# Altium PCB test-board-molex-bias-tee.PcbDoc (part 1 of 2)
Units mil, origin at the board's own origin, x right, y up, seen from the top; angles counter-clockwise.
Board outline 5500 x 3250 mil, 4 copper layers (Top Layer, Mid-Layer 1, Mid-Layer 2, Bottom Layer), stack 43.512 mil thick; 35 components, 16 nets, 287 pads, 1498 vias.
Unrouted connection lines stored in the file: 13.
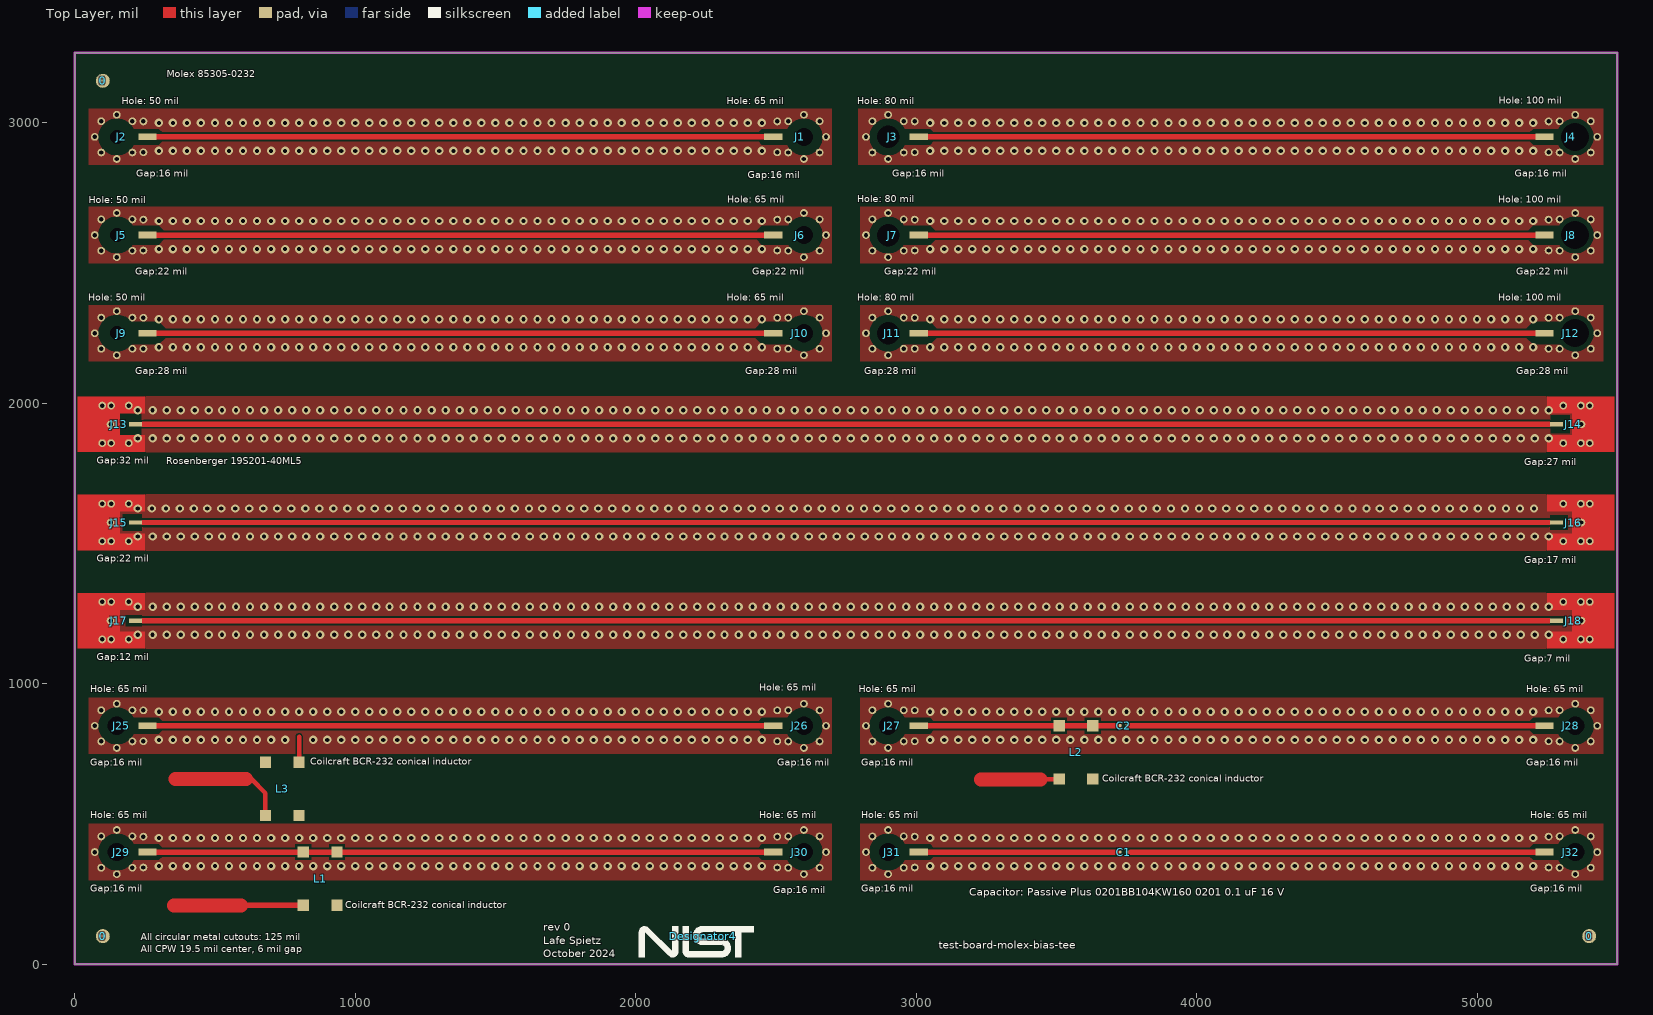
[diagram p0: Top Layer view]
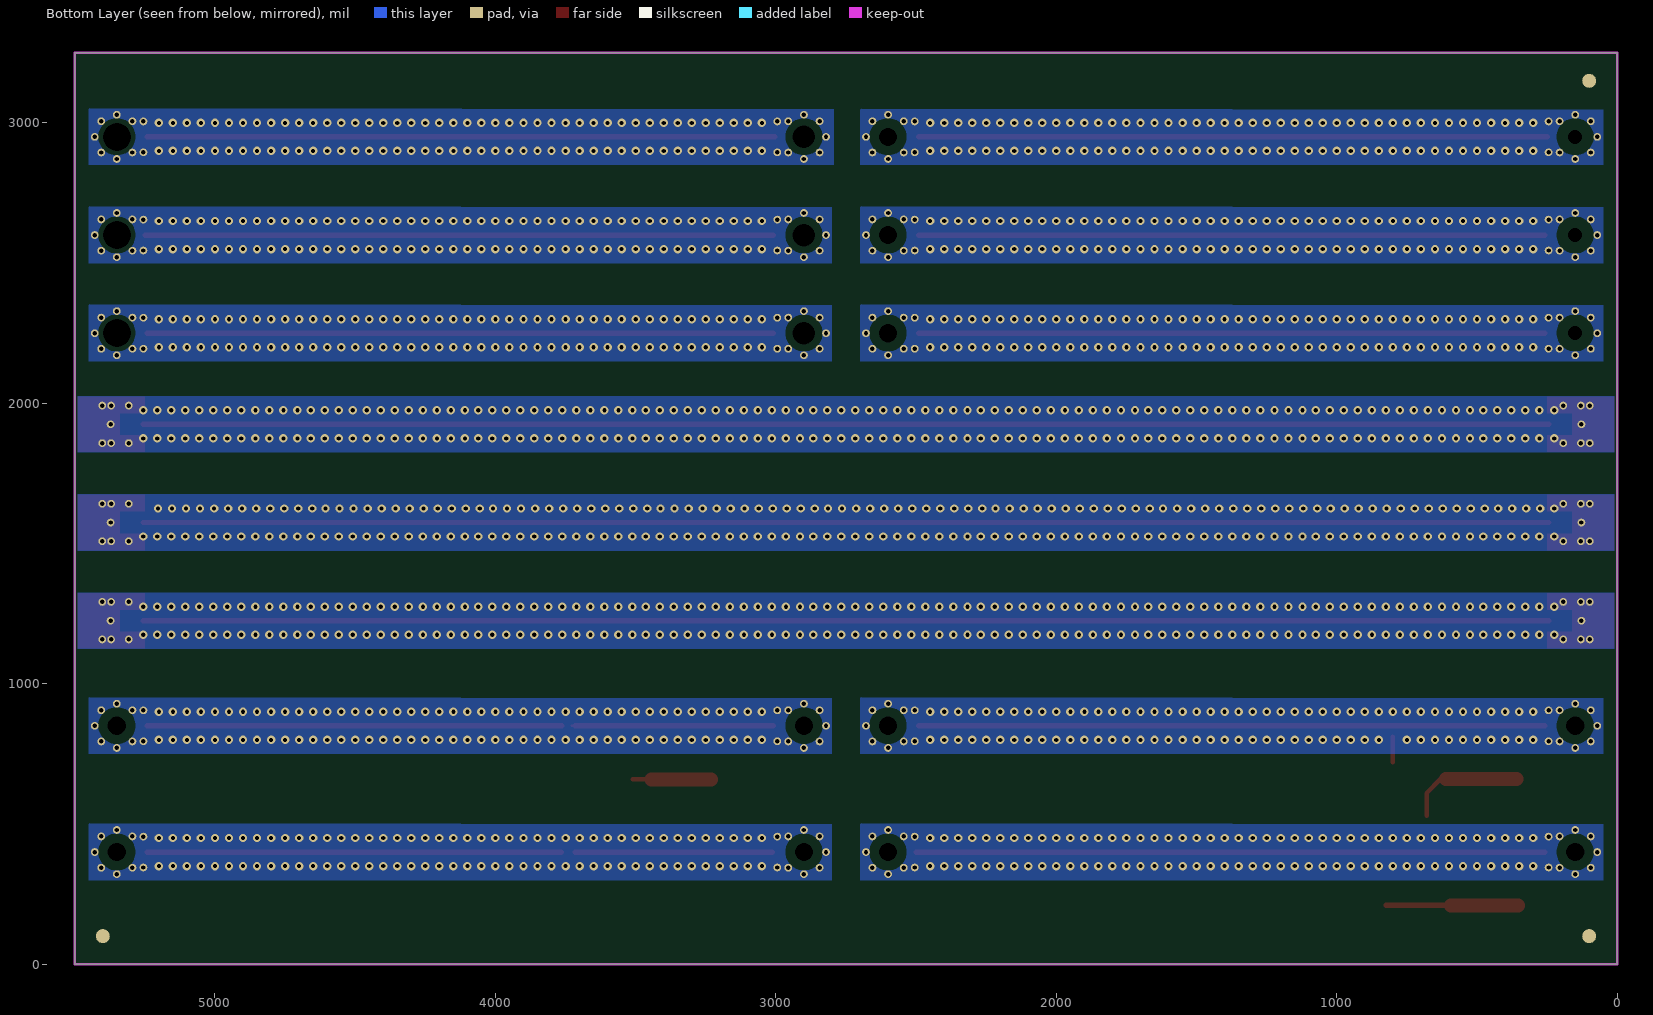
[diagram p1: Bottom Layer view, seen from below]
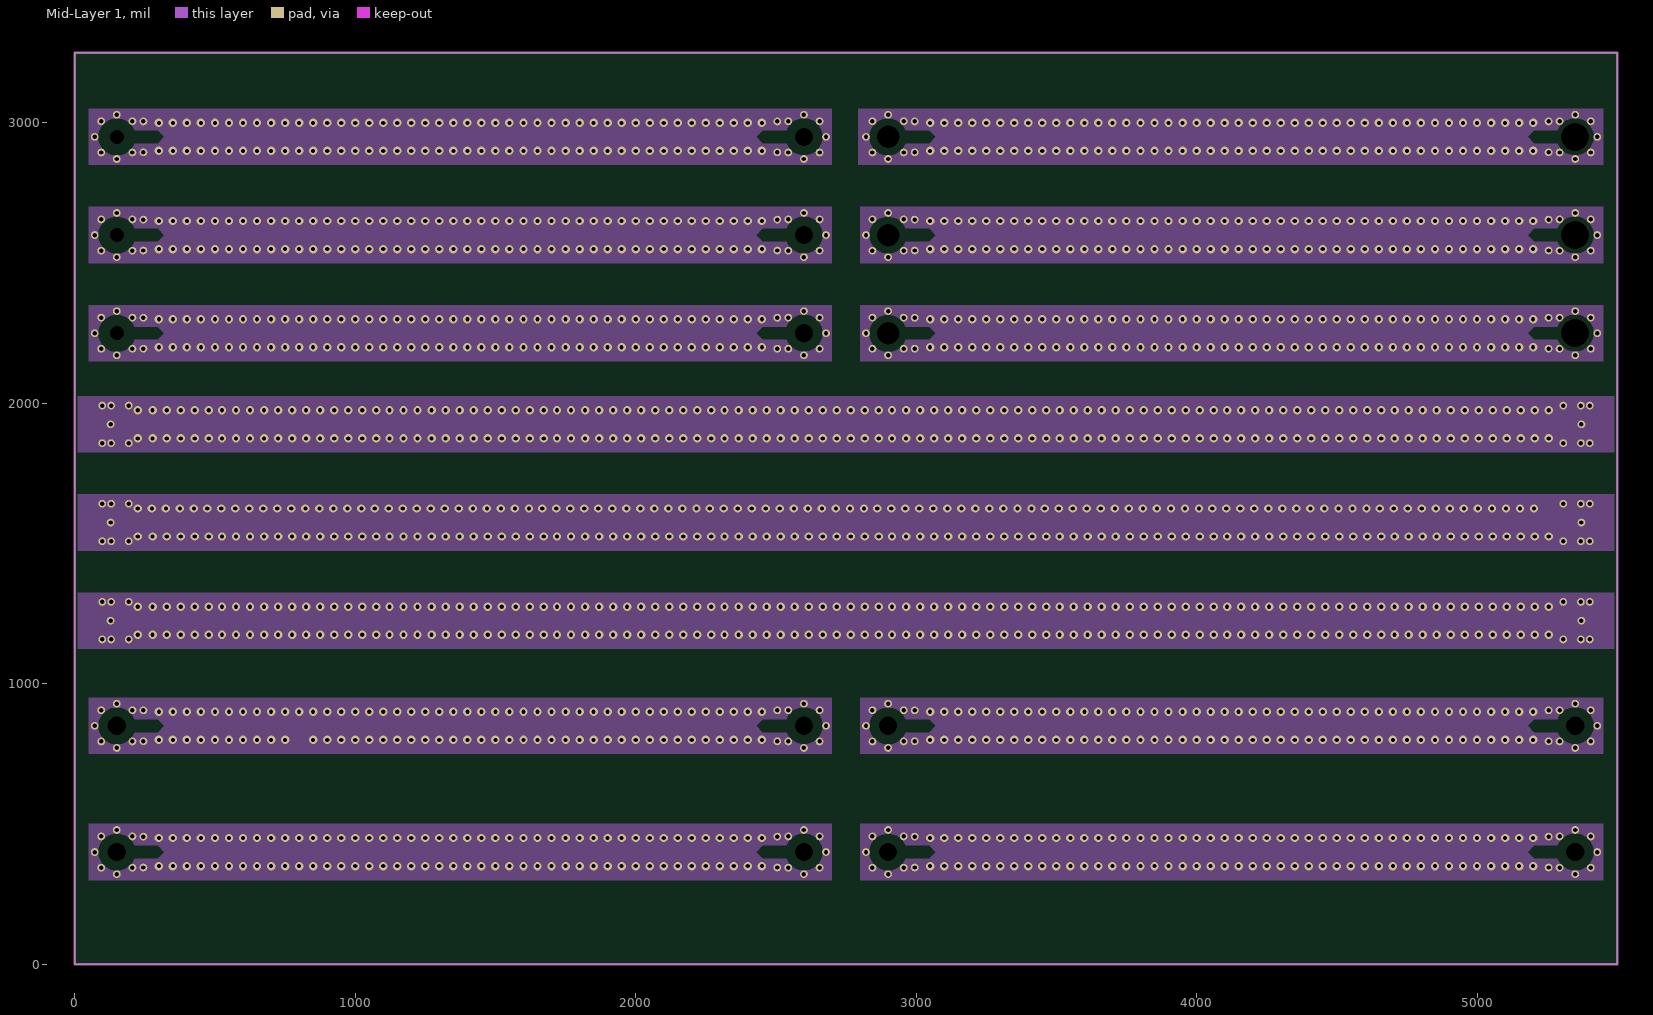
[diagram p2: Mid-Layer 1]
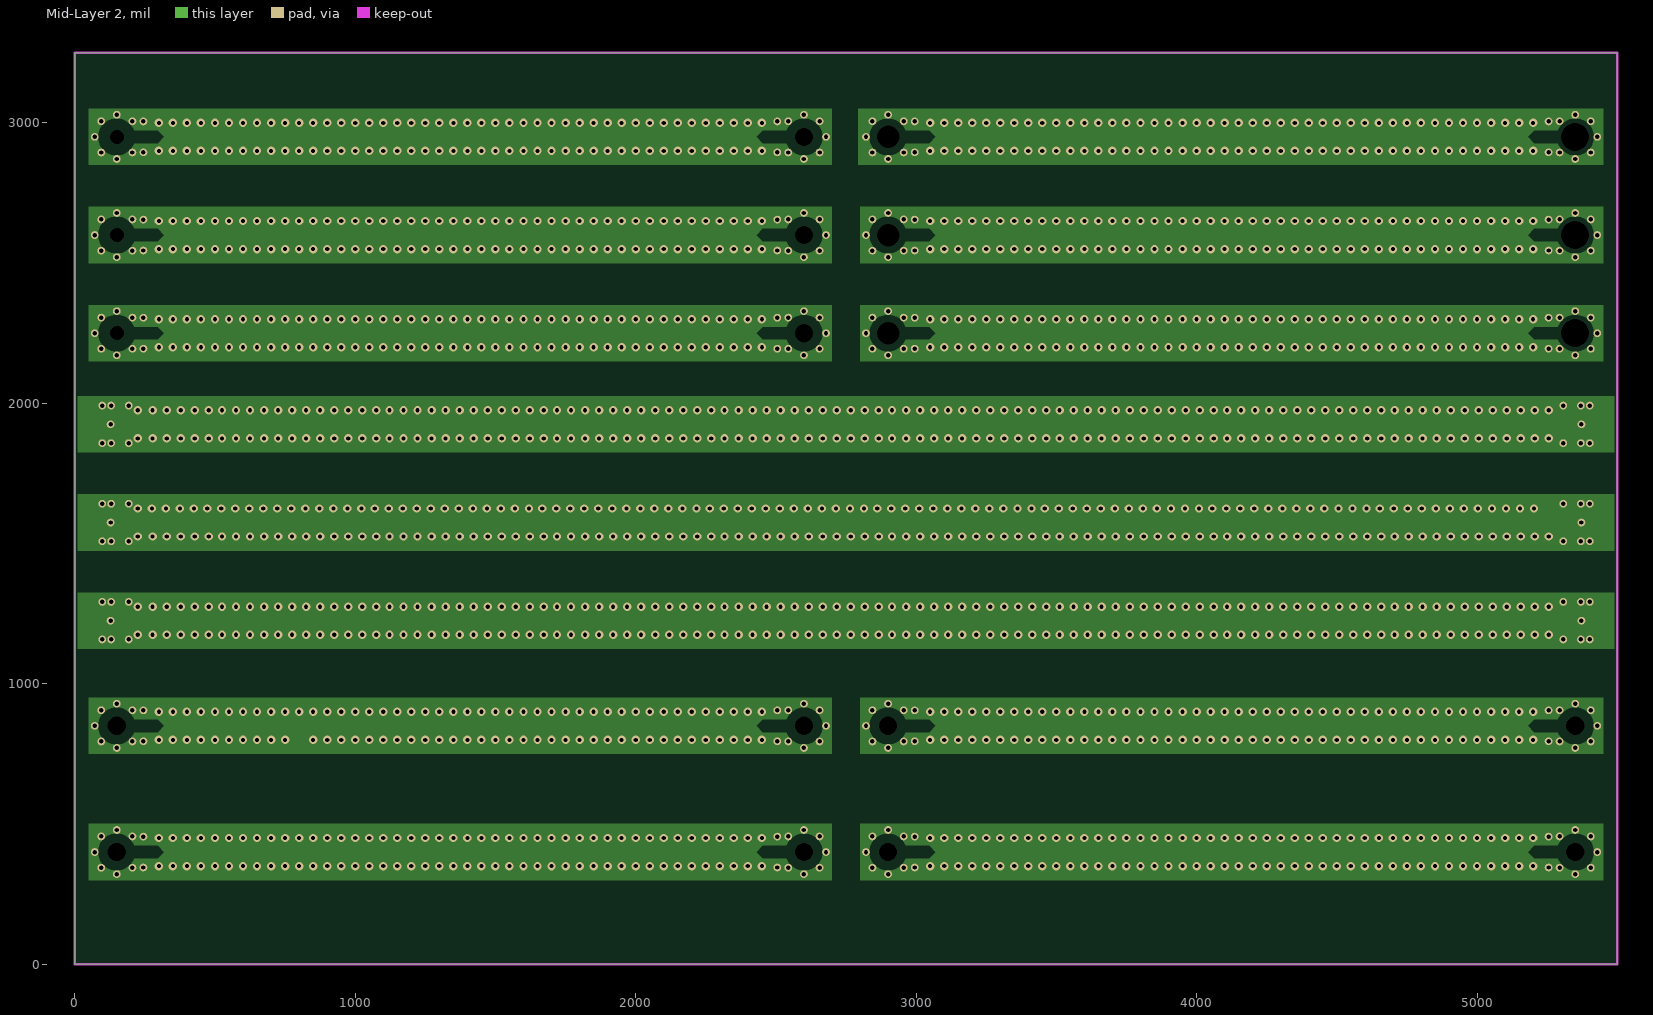
[diagram p3: Mid-Layer 2]
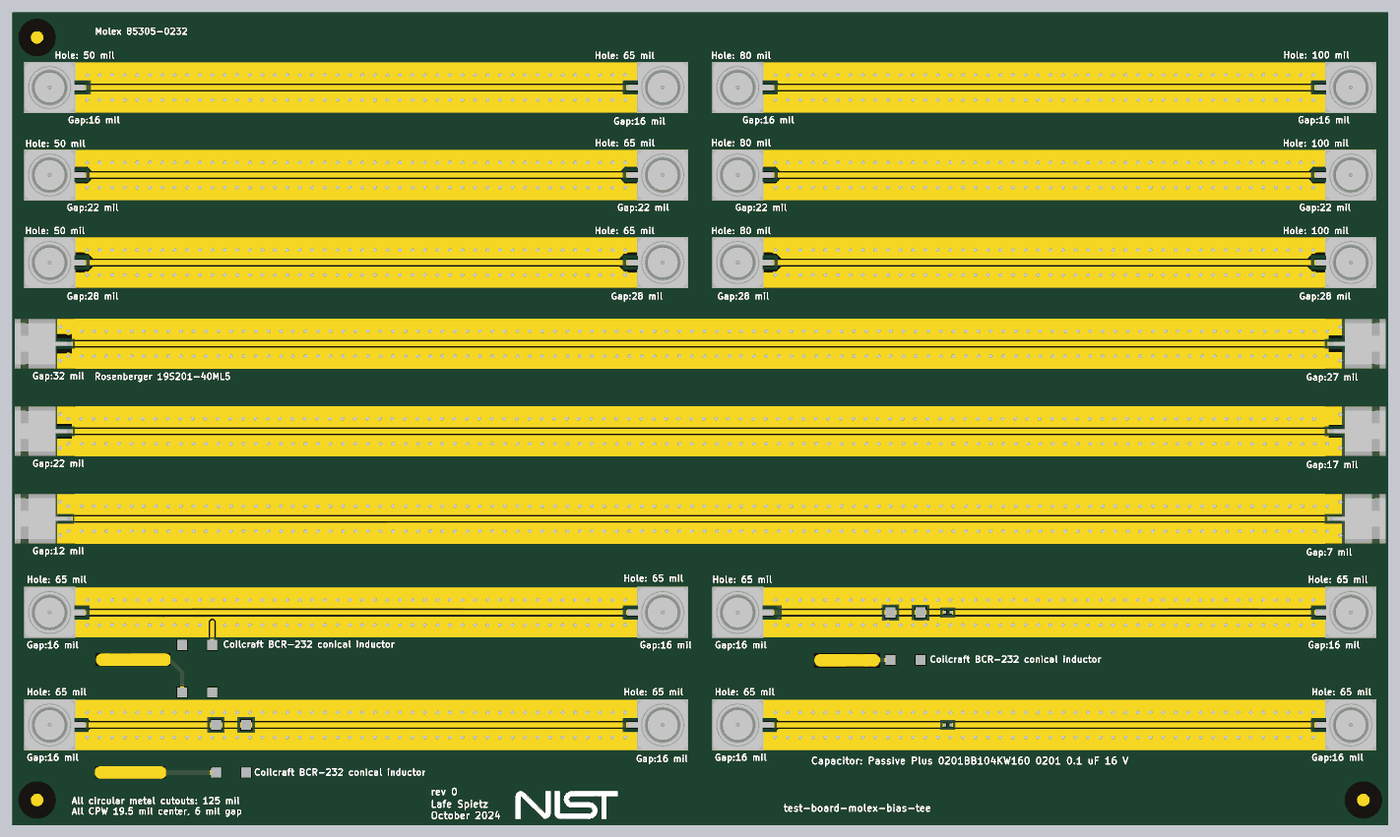
[diagram p5: 3D render of the assembled board from above, using the file's embedded part models]

## Layer stack, top to bottom
Top Solder: solder mask 1, SM-001, Dk 4
Top Layer: signal copper 1.378
Core1: dielectric 10, RO4350B, Dk 3.48
Mid-Layer 1: signal copper 1.378
Dielectric 1: prepreg 7, PR7628, Dk 4.24
Dielectric 2: prepreg 4, PR2116, Dk 4.17
Dielectric 3: prepreg 7, PR7628, Dk 4.24
Mid-Layer 2: signal copper 1.378
Core2: dielectric 10, RO-4350B, Dk 3.48
Bottom Layer: signal copper 1.378
Bottom Solder: solder mask 1, SM-001, Dk 4

## Board outline
0,0 5500,0 5500,3250 0,3250

## Design rules (kind name [scope] priority, off if disabled: settings)
Clearance [All] p1: gap=10 ignorepadtopadclearanceinfootprint=FALSE except(0: Poly-Poly Poly-Region Poly-Hole; 3.74: Track-Region SMDPad-Region Region-Region; 3.94: Track-Track Via-Poly; 4: Track-Fill; 6: Arc-Poly Track-Poly; 8: Arc-SMDPad Track-SMDPad SMDPad-Poly; 9: SMDPad-SMDPad)
PolygonConnect [All] p1: connectstyle=Direct reliefconductorwidth=10 reliefentries=4 polygonreliefangle="90 Angle" airgapwidth=10
RoutingVias [All] p1: holewidth=15 width=25 viastyle="Through Hole" minholewidth=5 minwidth=10 maxholewidth=28 maxwidth=50
SolderMaskExpansion [All] p1: expansion=4 istentingtop=FALSE
Width [All] p1 off: maxlimit=21.65 minlimit=3.94 preferedwidth=10 toplayer_prefwidth=3.94 midlayer1_minwidth=10 midlayer1_maxwidth=10 midlayer2_minwidth=10 midlayer2_maxwidth=10 bottomlayer_minwidth=10 bottomlayer_maxwidth=10 minimp=50.000000 maximp=50.000000 favimp=50.000000
Width cpw-Z-1 [All] p2 off: maxlimit=19.68 minlimit=6.87 preferedwidth=10 toplayer_minwidth=12.7 toplayer_prefwidth=15.98 impedanceprofiledriven=TRUE impedanceprofileid={FF6547F1-1ACB-4B88-A69B-03F59FE56022} minimp=50.000000 maximp=50.000000 favimp=50.000000
30 further rules are at their usual default settings.

## Classes and differential pairs
component class test-board-molex-bias-tee: C1 C2 J1 J2 J3 J4 J5 J6 J7 J8 J9 J10 J11 J12 J13 J14 J15 J16 J17 J18 J25 J26 J27 J28 J29 J30 J31 J32 L1 L2 L3

## Components (designator, comment, footprint, x,y, rotation, side; value= is the part's Value field where it differs from the comment)
0 "Fiducial" fiducial 100,100 r90 top
0 "Fiducial" fiducial 100,3150 r90 top
0 "Fiducial" fiducial 5400,100 r90 top
C1 "100 nF" 0201-capacitor 3740,400 r0 top
C2 "100 nF" 0201-capacitor 3740,850 r0 top
Designator4 "Comment" "NIST logo - TopOverlay" 2239.05,100.18 r0 top
J1 "85305-0232" MOLEX_85305-0232 2600,2950 r270 top
J2 "85305-0232" MOLEX_85305-0232 150,2950 r90 top
J3 "85305-0232" MOLEX_85305-0232 2900,2950 r90 top
J4 "85305-0232" MOLEX_85305-0232 5350,2950 r270 top
J5 "85305-0232" MOLEX_85305-0232 150,2600 r90 top
J6 "85305-0232" MOLEX_85305-0232 2600,2600 r270 top
J7 "85305-0232" MOLEX_85305-0232 2900,2600 r90 top
J8 "85305-0232" MOLEX_85305-0232 5350,2600 r270 top
J9 "85305-0232" MOLEX_85305-0232 150,2250 r90 top
J10 "85305-0232" MOLEX_85305-0232 2600,2250 r270 top
J11 "85305-0232" MOLEX_85305-0232 2900,2250 r90 top
J12 "85305-0232" MOLEX_85305-0232 5350,2250 r270 top
J13 "SMP-right-angle-19S201-40ML5" rosenberger-19S201-40ML5 110,1925 r90 top
J14 "SMP-right-angle-19S201-40ML5" rosenberger-19S201-40ML5 5390,1925 r270 top
J15 "SMP-right-angle-19S201-40ML5" rosenberger-19S201-40ML5 110,1575 r90 top
J16 "SMP-right-angle-19S201-40ML5" rosenberger-19S201-40ML5 5390,1575 r270 top
J17 "SMP-right-angle-19S201-40ML5" rosenberger-19S201-40ML5 110,1225 r90 top
J18 "SMP-right-angle-19S201-40ML5" rosenberger-19S201-40ML5 5390,1225 r270 top
J25 "85305-0232" MOLEX_85305-0232 150,850 r90 top
J26 "85305-0232" MOLEX_85305-0232 2600,850 r270 top
J27 "85305-0232" MOLEX_85305-0232 2900,850 r90 top
J28 "85305-0232" MOLEX_85305-0232 5350,850 r270 top
J29 "85305-0232" MOLEX_85305-0232 150,400 r90 top
J30 "85305-0232" MOLEX_85305-0232 2600,400 r270 top
J31 "85305-0232" MOLEX_85305-0232 2900,400 r90 top
J32 "85305-0232" MOLEX_85305-0232 5350,400 r270 top
L1 "Coilcraft BCR-232 conical inductor" "Coilcraft BCR-232 conical inductor" 875,305 r90 top
L2 "Coilcraft BCR-232 conical inductor" "Coilcraft BCR-232 conical inductor" 3570,755 r90 top
L3 "Coilcraft BCR-232 conical inductor" "Coilcraft BCR-232 conical inductor" 740,625 r90 top

## Footprints (in the part's own frame and the unit in brackets; to place one, negate y for a bottom-side part, rotate by r counter-clockwise, add the part's x,y. Pads: shape width x height; smd on the part's side, far side on the other; paste and mask are expansions set on the pad)
0201-capacitor [mm]
  rect 0.25x0.3 smd: 1(-0.3,0) 2(0.3,0)
"Coilcraft BCR-232 conical inductor" [mil] "Coilcraft BCR-232 conical inductor"
  rect 40x40 smd: 1(95,-60) 2(-95,60) *(-95,-60) *(95,60)
fiducial [mil]
  round 50 / inner round 0 / far side round 50 all layers, no hole paste-99999 mask+50: 1(0,0)
MOLEX_85305-0232 [mm]
  rect 0.61x1.651 smd: 1(0,-2.775)
  round 0.7 hole 0.4 mask+0: gnd(-2,0) gnd(-1.414,1.414) gnd(-1.414,-1.414) gnd(-1.4,-2.41) gnd(0,2) gnd(1.4,-2.41) gnd(1.414,1.414) gnd(1.414,-1.414) gnd(2,0)
  body extent -2.5,-3.5 2.5,2.5, height 4.06
"NIST logo - TopOverlay" [mil]
  silkscreen extent -227,-76 181,35
rosenberger-19S201-40ML5 [mm]
  rect 0.4x1.15 smd: 1(0,-2.7)
  round 0.7 hole 0.4 mask+0: gnd(-1.7,-2.1) gnd(-1.7,-0.5) gnd(-1.7,0.3) gnd(0,-0.45) gnd(1.7,-2.1) gnd(1.7,-0.5) gnd(1.7,0.3)
  Top Layer region: 1,-1.3 1,-3.55 2.5,-3.55 2.5,2.5 -2.5,2.5 -2.5,-3.55 -1,-3.55 -1,-1.3
  body extent -2.5,-2.75 2.5,2.5, height 5

## Part data
C1 C2: library part "100 nF DC block capacitor 0201", "BROADBAND CAPACITOR, 100 nF, 0201"
J1 J2 J3 J4 J5 J6 J7 J8 J9 J10 J11 J12 J25 J26 J27 J28 J29 J30 J31 J32: "SMP Connector Plug, Male Pin 50Ohm Surface Mount Solder", Package=None, Availability="In Stock", Check_prices=https://www.snapeda.com/parts/853050232/Molex/view-part/?ref=eda, MF=Molex, MP=853050232, Price=None, Purchase-URL=https://pricing.snapeda.com/search/part/853050232/?ref=eda, SnapEDA_Link=https://www.snapeda.com/parts/853050232/Molex/view-part/?ref=snap
J13 J14 J15 J16 J17 J18: "SMOOTH BORE SMP Connector Plug, Male Pin 50Ohm Surface Mount Solder", Package=None, Supplier Part Number 1=476-19S201-40ML5, Availability="In Stock", Check_prices=https://www.snapeda.com/parts/853050232/Molex/view-part/?ref=eda, MF=Molex, MP=853050232, Price=None, Purchase-URL=https://pricing.snapeda.com/search/part/853050232/?ref=eda, SnapEDA_Link=https://www.snapeda.com/parts/853050232/Molex/view-part/?ref=snap, Supplier 1=Mouser
L1 L2 L3: "No Description Available", Mfr_Name=Murata

## Free pads (board coordinates)
  round 0 hole 65 unplated: ""(150,400) ""(150,850) ""(2600,400) ""(2600,850) ""(2600,2250) ""(2600,2600) ""(2600,2950) ""(2900,400) ""(2900,850) ""(5350,400) ""(5350,850)
  round 0 hole 50 unplated: ""(150,2250) ""(150,2600) ""(150,2950)
  round 0 hole 80 unplated: ""(2900,2250) ""(2900,2600) ""(2900,2950)
  round 0 hole 100 unplated: ""(5350,2250) ""(5350,2600) ""(5350,2950)

## Via types
v1: diameter 30, hole 15, Top Layer to Bottom Layer, 1498 vias

## Nets (pads, with @x,y where several pads share a name; then routed paths per layer and width w, separated by ;. In a path a pad name is that pad's centre, name@x,y a point inside that pad or via, vN(x,y) a via of type N, cw(c..) or ccw(c..) an arc to the next point about the centre after c; other vN are vias at no path point)
GND: J1.gnd J2.gnd J3.gnd J4.gnd J5.gnd J6.gnd J7.gnd J8.gnd J9.gnd J10.gnd J11.gnd J12.gnd J13.gnd J14.gnd J15.gnd J16.gnd J17.gnd J18.gnd J25.gnd J26.gnd J27.gnd J28.gnd J29.gnd J30.gnd J31.gnd J32.gnd
  other v1: 300,350 350,350 400,350 450,350 500,350 550,350 600,350 650,350 700,350 750,350 800,350 850,350 900,350 950,350 1000,350 1050,350 1100,350 1150,350 1200,350 1250,350 1300,350 1350,350 1400,350 1450,350 1500,350 1550,350 1600,350 1650,350 1700,350 1750,350 1800,350 1850,350 1900,350 1950,350 2000,350 2050,350 2100,350 2150,350 2200,350 2250,350 2300,350 2350,350 2400,350 2450,350 3050,350 3100,350 3150,350 3200,350 3250,350 3300,350 3350,350 3400,350 3450,350 3500,350 3550,350 3600,350 3650,350 3700,350 3750,350 3800,350 3850,350 3900,350 3950,350 4000,350 4050,350 4100,350 4150,350 4200,350 4250,350 4300,350 4350,350 4400,350 4450,350 4500,350 4550,350 4600,350 4650,350 4700,350 4750,350 4800,350 4850,350 4900,350 4950,350 5000,350 5050,350 5100,350 5150,350 5200,350 300,450 350,450 400,450 450,450 500,450 550,450 600,450 650,450 700,450 750,450 800,450 850,450 900,450 950,450 1000,450 1050,450 1100,450 1150,450 1200,450 1250,450 1300,450 1350,450 1400,450 1450,450 1500,450 1550,450 1600,450 1650,450 1700,450 1750,450 1800,450 1850,450 1900,450 1950,450 2000,450 2050,450 2100,450 2150,450 2200,450 2250,450 2300,450 2350,450 2400,450 2450,450 3050,450 3100,450 3150,450 3200,450 3250,450 3300,450 3350,450 3400,450 3450,450 3500,450 3550,450 3600,450 3650,450 3700,450 3750,450 3800,450 3850,450 3900,450 3950,450 4000,450 4050,450 4100,450 4150,450 4200,450 4250,450 4300,450 4350,450 4400,450 4450,450 4500,450 4550,450 4600,450 4650,450 4700,450 4750,450 4800,450 4850,450 4900,450 4950,450 5000,450 5050,450 5100,450 5150,450 5200,450 300,800 350,800 400,800 450,800 500,800 550,800 600,800 650,800 700,800 750,800 850,800 900,800 950,800 1000,800 1050,800 1100,800 1150,800 1200,800 1250,800 1300,800 1350,800 1400,800 1450,800 1500,800 1550,800 1600,800 1650,800 1700,800 1750,800 1800,800 1850,800 1900,800 1950,800 2000,800 2050,800 2100,800 2150,800 2200,800 2250,800 2300,800 2350,800 2400,800 2450,800 3050,800 3100,800 3150,800 3200,800 3250,800 3300,800 3350,800 3400,800 3450,800 3500,800 3550,800 3600,800 3650,800 3700,800 3750,800 3800,800 3850,800 3900,800 3950,800 4000,800 4050,800 4100,800 4150,800 4200,800 4250,800 4300,800 4350,800 4400,800 4450,800 4500,800 4550,800 4600,800 4650,800 4700,800 4750,800 4800,800 4850,800 4900,800 4950,800 5000,800 5050,800 5100,800 5150,800 5200,800 300,900 350,900 400,900 450,900 500,900 550,900 600,900 650,900 700,900 750,900 800,900 850,900 900,900 950,900 1000,900 1050,900 1100,900 1150,900 1200,900 1250,900 1300,900 1350,900 1400,900 1450,900 1500,900 1550,900 1600,900 1650,900 1700,900 1750,900 1800,900 1850,900 1900,900 1950,900 2000,900 2050,900 2100,900 2150,900 2200,900 2250,900 2300,900 2350,900 2400,900 2450,900 3050,900 3100,900 3150,900 3200,900 3250,900 3300,900 3350,900 3400,900 3450,900 3500,900 3550,900 3600,900 3650,900 3700,900 3750,900 3800,900 3850,900 3900,900 3950,900 4000,900 4050,900 4100,900 4150,900 4200,900 4250,900 4300,900 4350,900 4400,900 4450,900 4500,900 4550,900 4600,900 4650,900 4700,900 4750,900 4800,900 4850,900 4900,900 4950,900 5000,900 5050,900 5100,900 5150,900 5200,900 225,1175 277.72,1175 327.72,1175 377.72,1175 427.72,1175 477.72,1175 525,1175 575,1175 625,1175 675,1175 725,1175 775,1175 825,1175 875,1175 925,1175 975,1175 1025,1175 1075,1175 1122.28,1175 1172.28,1175 1222.28,1175 1272.28,1175 1322.28,1175 1372.28,1175 1422.28,1175 1472.28,1175 1522.28,1175 1572.28,1175 1622.28,1175 1672.28,1175 1719.57,1175 1769.57,1175 1819.57,1175 1869.57,1175 1919.57,1175 1969.57,1175 2019.57,1175 2069.57,1175 2119.57,1175 2169.57,1175 2219.57,1175 2269.57,1175 2316.85,1175 2366.85,1175 2416.85,1175 2466.85,1175 2516.85,1175 2566.85,1175 2616.85,1175 2666.85,1175 2716.85,1175 2766.85,1175 2816.85,1175 2866.85,1175 2914.13,1175 2964.13,1175 3014.13,1175 3064.13,1175 3114.13,1175 3164.13,1175 3214.13,1175 3264.13,1175 3314.13,1175 3364.13,1175 3414.13,1175 3464.13,1175 3511.42,1175 3561.42,1175 3611.42,1175 3661.42,1175 3711.42,1175 3761.42,1175 3811.42,1175 3861.42,1175 3911.42,1175 3961.42,1175 4011.42,1175 4061.42,1175 4108.7,1175 4158.7,1175 4208.7,1175 4258.7,1175 4308.7,1175 4358.7,1175 4408.7,1175 4458.7,1175 4508.7,1175 4558.7,1175 4608.7,1175 4658.7,1175 4705.98,1175 4755.98,1175 4805.98,1175 4855.98,1175 4905.98,1175 4955.98,1175 5005.98,1175 5055.98,1175 5105.98,1175 5155.98,1175 5205.98,1175 5255.98,1175 225,1275 277.72,1275 327.72,1275 377.72,1275 427.72,1275 477.72,1275 525,1275 575,1275 625,1275 675,1275 725,1275 775,1275 825,1275 875,1275 925,1275 975,1275 1025,1275 1075,1275 1122.28,1275 1172.28,1275 1222.28,1275 1272.28,1275 1322.28,1275 1372.28,1275 1422.28,1275 1472.28,1275 1522.28,1275 1572.28,1275 1622.28,1275 1672.28,1275 1719.57,1275 1769.57,1275 1819.57,1275 1869.57,1275 1919.57,1275 1969.57,1275 2019.57,1275 2069.57,1275 2119.57,1275 2169.57,1275 2219.57,1275 2269.57,1275 2316.85,1275 2366.85,1275 2416.85,1275 2466.85,1275 2516.85,1275 2566.85,1275 2616.85,1275 2666.85,1275 2716.85,1275 2766.85,1275 2816.85,1275 2866.85,1275 2914.13,1275 2964.13,1275 3014.13,1275 3064.13,1275 3114.13,1275 3164.13,1275 3214.13,1275 3264.13,1275 3314.13,1275 3364.13,1275 3414.13,1275 3464.13,1275 3511.42,1275 3561.42,1275 3611.42,1275 3661.42,1275 3711.42,1275 3761.42,1275 3811.42,1275 3861.42,1275 3911.42,1275 3961.42,1275 4011.42,1275 4061.42,1275 4108.7,1275 4158.7,1275 4208.7,1275 4258.7,1275 4308.7,1275 4358.7,1275 4408.7,1275 4458.7,1275 4508.7,1275 4558.7,1275 4608.7,1275 4658.7,1275 4705.98,1275 4755.98,1275 4805.98,1275 4855.98,1275 4905.98,1275 4955.98,1275 5005.98,1275 5055.98,1275 5105.98,1275 5155.98,1275 5205.98,1275 5255.98,1275 225,1525 277.72,1525 327.72,1525 377.72,1525 427.72,1525 477.72,1525 525,1525 575,1525 625,1525 675,1525 725,1525 775,1525 825,1525 875,1525 925,1525 975,1525 1025,1525 1075,1525 1122.28,1525 1172.28,1525 1222.28,1525 1272.28,1525 1322.28,1525 1372.28,1525 1422.28,1525 1472.28,1525 1522.28,1525 1572.28,1525 1622.28,1525 1672.28,1525 1719.57,1525 1769.57,1525 1819.57,1525 1869.57,1525 1919.57,1525 1969.57,1525 2019.57,1525 2069.57,1525 2119.57,1525 2169.57,1525 2219.57,1525 2269.57,1525 2316.85,1525 2366.85,1525 2416.85,1525 2466.85,1525 2516.85,1525 2566.85,1525 2616.85,1525 2666.85,1525 2716.85,1525 2766.85,1525 2816.85,1525 2866.85,1525 2866.85,1525 2914.13,1525 2964.13,1525 3014.13,1525 3014.13,1525 3064.13,1525 3114.13,1525 3164.13,1525 3214.13,1525 3264.13,1525 3314.13,1525 3364.13,1525 3414.13,1525 3464.13,1525 3511.42,1525 3561.42,1525 3611.42,1525 3661.42,1525 3711.42,1525 3761.42,1525 3811.42,1525 3861.42,1525 3911.42,1525 3961.42,1525 4011.42,1525 4061.42,1525 4108.7,1525 4158.7,1525 4208.7,1525 4258.7,1525 4308.7,1525 4358.7,1525 4408.7,1525 4458.7,1525 4508.7,1525 4558.7,1525 4608.7,1525 4658.7,1525 4705.98,1525 4755.98,1525 4805.98,1525 4855.98,1525 4905.98,1525 4955.98,1525 5005.98,1525 5055.98,1525 5105.98,1525 5155.98,1525 5205.98,1525 5255.98,1525 225,1625 275,1625 325,1625 375,1625 425,1625 472.28,1625 522.28,1625 572.28,1625 622.28,1625 672.28,1625 722.28,1625 772.28,1625 822.28,1625 872.28,1625 922.28,1625 972.28,1625 1022.28,1625 1069.57,1625 1119.57,1625 1169.57,1625 1219.57,1625 1269.57,1625 1319.57,1625 1369.57,1625 1419.57,1625 1469.57,1625 1519.57,1625 1569.57,1625 1619.57,1625 1666.85,1625 1716.85,1625 1766.85,1625 1816.85,1625 1866.85,1625 1916.85,1625 1966.85,1625 2016.85,1625 2066.85,1625 2116.85,1625 2166.85,1625 2216.85,1625 2264.13,1625 2314.13,1625 2364.13,1625 2414.13,1625 2464.13,1625 2514.13,1625 2564.13,1625 2614.13,1625 2664.13,1625 2714.13,1625 2764.13,1625 2814.13,1625 2814.13,1625 2861.42,1625 2911.42,1625 2961.42,1625 2961.42,1625 3011.42,1625 3061.42,1625 3111.42,1625 3161.42,1625 3211.42,1625 3261.42,1625 3311.42,1625 3361.42,1625 3411.42,1625 3458.7,1625 3508.7,1625 3558.7,1625 3608.7,1625 3658.7,1625 3708.7,1625 3758.7,1625 3808.7,1625 3858.7,1625 3908.7,1625 3958.7,1625 4008.7,1625 4055.98,1625 4105.98,1625 4155.98,1625 4205.98,1625 4255.98,1625 4305.98,1625 4355.98,1625 4405.98,1625 4455.98,1625 4505.98,1625 4555.98,1625 4605.98,1625 4653.27,1625 4703.27,1625 4753.27,1625 4803.27,1625 4853.27,1625 4903.27,1625 4953.27,1625 5003.27,1625 5053.27,1625 5103.27,1625 5153.27,1625 5203.27,1625 225,1875 277.72,1875 327.72,1875 377.72,1875 427.72,1875 477.72,1875 525,1875 575,1875 625,1875 675,1875 725,1875 775,1875 825,1875 875,1875 925,1875 975,1875 1025,1875 1075,1875 1122.28,1875 1172.28,1875 1222.28,1875 1272.28,1875 1322.28,1875 1372.28,1875 1422.28,1875 1472.28,1875 1522.28,1875 1572.28,1875 1622.28,1875 1672.28,1875 1719.57,1875 1769.57,1875 1819.57,1875 1869.57,1875 1919.57,1875 1969.57,1875 2019.57,1875 2069.57,1875 2119.57,1875 2169.57,1875 2219.57,1875 2269.57,1875 2316.85,1875 2366.85,1875 2416.85,1875 2466.85,1875 2516.85,1875 2566.85,1875 2616.85,1875 2666.85,1875 2716.85,1875 2766.85,1875 2816.85,1875 2866.85,1875 2866.85,1875 2914.13,1875 2964.13,1875 3014.13,1875 3014.13,1875 3064.13,1875 3114.13,1875 3164.13,1875 3214.13,1875 3264.13,1875 3314.13,1875 3364.13,1875 3414.13,1875 3464.13,1875 3511.42,1875 3561.42,1875 3611.42,1875 3661.42,1875 3711.42,1875 3761.42,1875 3811.42,1875 3861.42,1875 3911.42,1875 3961.42,1875 4011.42,1875 4061.42,1875 4108.7,1875 4158.7,1875 4208.7,1875 4258.7,1875 4308.7,1875 4358.7,1875 4408.7,1875 4458.7,1875 4508.7,1875 4558.7,1875 4608.7,1875 4658.7,1875 4705.98,1875 4755.98,1875 4805.98,1875 4855.98,1875 4905.98,1875 4955.98,1875 5005.98,1875 5055.98,1875 5105.98,1875 5155.98,1875 5205.98,1875 5255.98,1875 225,1975 277.72,1975 327.72,1975 377.72,1975 427.72,1975 477.72,1975 525,1975 575,1975 625,1975 675,1975 725,1975 775,1975 825,1975 875,1975 925,1975 975,1975 1025,1975 1075,1975 1122.28,1975 1172.28,1975 1222.28,1975 1272.28,1975 1322.28,1975 1372.28,1975 1422.28,1975 1472.28,1975 1522.28,1975 1572.28,1975 1622.28,1975 1672.28,1975 1719.57,1975 1769.57,1975 1819.57,1975 1869.57,1975 1919.57,1975 1969.57,1975 2019.57,1975 2069.57,1975 2119.57,1975 2169.57,1975 2219.57,1975 2269.57,1975 2316.85,1975 2366.85,1975 2416.85,1975 2466.85,1975 2516.85,1975 2566.85,1975 2616.85,1975 2666.85,1975 2716.85,1975 2766.85,1975 2816.85,1975 2866.85,1975 2866.85,1975 2914.13,1975 2964.13,1975 3014.13,1975 3014.13,1975 3064.13,1975 3114.13,1975 3164.13,1975 3214.13,1975 3264.13,1975 3314.13,1975 3364.13,1975 3414.13,1975 3464.13,1975 3511.42,1975 3561.42,1975 3611.42,1975 3661.42,1975 3711.42,1975 3761.42,1975 3811.42,1975 3861.42,1975 3911.42,1975 3961.42,1975 4011.42,1975 4061.42,1975 4108.7,1975 4158.7,1975 4208.7,1975 4258.7,1975 4308.7,1975 4358.7,1975 4408.7,1975 4458.7,1975 4508.7,1975 4558.7,1975 4608.7,1975 4658.7,1975 4705.98,1975 4755.98,1975 4805.98,1975 4855.98,1975 4905.98,1975 4955.98,1975 5005.98,1975 5055.98,1975 5105.98,1975 5155.98,1975 5205.98,1975 5255.98,1975 300,2200 350,2200 400,2200 450,2200 500,2200 550,2200 600,2200 650,2200 700,2200 750,2200 800,2200 850,2200 900,2200 950,2200 1000,2200 1050,2200 1100,2200 1150,2200 1200,2200 1250,2200 1300,2200 1350,2200 1400,2200 1450,2200 1500,2200 1550,2200 1600,2200 1650,2200 1700,2200 1750,2200 1800,2200 1850,2200 1900,2200 1950,2200 2000,2200 2050,2200 2100,2200 2150,2200 2200,2200 2250,2200 2300,2200 2350,2200 2400,2200 2450,2200 3050,2200 3100,2200 3150,2200 3200,2200 3250,2200 3300,2200 3350,2200 3400,2200 3450,2200 3500,2200 3550,2200 3600,2200 3650,2200 3700,2200 3750,2200 3800,2200 3850,2200 3900,2200 3950,2200 4000,2200 4050,2200 4100,2200 4150,2200 4200,2200 4250,2200 4300,2200 4350,2200 4400,2200 4450,2200 4500,2200 4550,2200 4600,2200 4650,2200 4700,2200 4750,2200 4800,2200 4850,2200 4900,2200 4950,2200 5000,2200 5050,2200 5100,2200 5150,2200 5200,2200 300,2300 350,2300 400,2300 450,2300 500,2300 550,2300 600,2300 650,2300 700,2300 750,2300 800,2300 850,2300 900,2300 950,2300 1000,2300 1050,2300 1100,2300 1150,2300 1200,2300 1250,2300 1300,2300 1350,2300 1400,2300 1450,2300 1500,2300 1550,2300 1600,2300 1650,2300 1700,2300 1750,2300 1800,2300 1850,2300 1900,2300 1950,2300 2000,2300 2050,2300 2100,2300 2150,2300 2200,2300 2250,2300 2300,2300 2350,2300 2400,2300 2450,2300 3050,2300 3100,2300 3150,2300 3200,2300 3250,2300 3300,2300 3350,2300 3400,2300 3450,2300 3500,2300 3550,2300 3600,2300 3650,2300 3700,2300 3750,2300 3800,2300 3850,2300 3900,2300 3950,2300 4000,2300 4050,2300 4100,2300 4150,2300 4200,2300 4250,2300 4300,2300 4350,2300 4400,2300 4450,2300 4500,2300 4550,2300 4600,2300 4650,2300 4700,2300 4750,2300 4800,2300 4850,2300 4900,2300 4950,2300 5000,2300 5050,2300 5100,2300 5150,2300 5200,2300 300,2550 350,2550 400,2550 450,2550 500,2550 550,2550 600,2550 650,2550 700,2550 750,2550 800,2550 850,2550 900,2550 950,2550 1000,2550 1050,2550 1100,2550 1150,2550 1200,2550 1250,2550 1300,2550 1350,2550 1400,2550 1450,2550 1500,2550 1550,2550 1600,2550 1650,2550 1700,2550 1750,2550 1800,2550 1850,2550 1900,2550 1950,2550 2000,2550 2050,2550 2100,2550 2150,2550 2200,2550 2250,2550 2300,2550 2350,2550 2400,2550 2450,2550 3050,2550 3100,2550 3150,2550 3200,2550 3250,2550 3300,2550 3350,2550 3400,2550 3450,2550 3500,2550 3550,2550 3600,2550 3650,2550 3700,2550 3750,2550 3800,2550 3850,2550 3900,2550 3950,2550 4000,2550 4050,2550 4100,2550 4150,2550 4200,2550 4250,2550 4300,2550 4350,2550 4400,2550 4450,2550 4500,2550 4550,2550 4600,2550 4650,2550 4700,2550 4750,2550 4800,2550 4850,2550 4900,2550 4950,2550 5000,2550 5050,2550 5100,2550 5150,2550 5200,2550 300,2650 350,2650 400,2650 450,2650 500,2650 550,2650 600,2650 650,2650 700,2650 750,2650 800,2650 850,2650 900,2650 950,2650 1000,2650 1050,2650 1100,2650 1150,2650 1200,2650 1250,2650 1300,2650 1350,2650 1400,2650 1450,2650 1500,2650 1550,2650 1600,2650 1650,2650 1700,2650 1750,2650 1800,2650 1850,2650 1900,2650 1950,2650 2000,2650 2050,2650 2100,2650 2150,2650 2200,2650 2250,2650 2300,2650 2350,2650 2400,2650 2450,2650 3050,2650 3100,2650 3150,2650 3200,2650 3250,2650 3300,2650 3350,2650 3400,2650 3450,2650 3500,2650 3550,2650 3600,2650 3650,2650 3700,2650 3750,2650 3800,2650 3850,2650 3900,2650 3950,2650 4000,2650 4050,2650 4100,2650 4150,2650 4200,2650 4250,2650 4300,2650 4350,2650 4400,2650 4450,2650 4500,2650 4550,2650 4600,2650 4650,2650 4700,2650 4750,2650 4800,2650 4850,2650 4900,2650 4950,2650 5000,2650 5050,2650 5100,2650 5150,2650 5200,2650 300,2900 350,2900 400,2900 450,2900 500,2900 550,2900 600,2900 650,2900 700,2900 750,2900 800,2900 850,2900 900,2900 950,2900 1000,2900 1050,2900 1100,2900 1150,2900 1200,2900 1250,2900 1300,2900 1350,2900 1400,2900 1450,2900 1500,2900 1550,2900 1600,2900 1650,2900 1700,2900 1750,2900 1800,2900 1850,2900 1900,2900 1950,2900 2000,2900 2050,2900 2100,2900 2150,2900 2200,2900 2250,2900 2300,2900 2350,2900 2400,2900 2450,2900 3050,2900 3100,2900 3150,2900 3200,2900 3250,2900 3300,2900 3350,2900 3400,2900 3450,2900 3500,2900 3550,2900 3600,2900 3650,2900 3700,2900 3750,2900 3800,2900 3850,2900 3900,2900 3950,2900 4000,2900 4050,2900 4100,2900 4150,2900 4200,2900 4250,2900 4300,2900 4350,2900 4400,2900 4450,2900 4500,2900 4550,2900 4600,2900 4650,2900 4700,2900 4750,2900 4800,2900 4850,2900 4900,2900 4950,2900 5000,2900 5050,2900 5100,2900 5150,2900 5200,2900 300,3000 350,3000 400,3000 450,3000 500,3000 550,3000 600,3000 650,3000 700,3000 750,3000 800,3000 850,3000 900,3000 950,3000 1000,3000 1050,3000 1100,3000 1150,3000 1200,3000 1250,3000 1300,3000 1350,3000 1400,3000 1450,3000 1500,3000 1550,3000 1600,3000 1650,3000 1700,3000 1750,3000 1800,3000 1850,3000 1900,3000 1950,3000 2000,3000 2050,3000 2100,3000 2150,3000 2200,3000 2250,3000 2300,3000 2350,3000 2400,3000 2450,3000 3050,3000 3100,3000 3150,3000 3200,3000 3250,3000 3300,3000 3350,3000 3400,3000 3450,3000 3500,3000 3550,3000 3600,3000 3650,3000 3700,3000 3750,3000 3800,3000 3850,3000 3900,3000 3950,3000 4000,3000 4050,3000 4100,3000 4150,3000 4200,3000 4250,3000 4300,3000 4350,3000 4400,3000 4450,3000 4500,3000 4550,3000 4600,3000 4650,3000 4700,3000 4750,3000 4800,3000 4850,3000 4900,3000 4950,3000 5000,3000 5050,3000 5100,3000 5150,3000 5200,3000
NetC1_1: C1.1 J31.1 | length 702.8
  Top Layer w19.5: J31.1@3013,400 3715.75,400
NetC1_2: C1.2 J32.1 | length 1476.4
  Top Layer w19.5: 3764.37,400 J32.1@5240.75,400
NetC2_1: C2.1 J27.1 L2.1 L2.*@3510,850 | length 718.9
  Top Layer w10: 3716,850 C2.1@3728.19,850
  Top Layer w19.5: J27.1@3009.25,850 L2.1@3630,850 3716,850
NetC2_2: C2.2 J28.1 | length 1476.7
  Top Layer w19.5: 3764,850 J28.1@5240.75,850
NetJ1_1: J1.1 J2.1 | length 2240.7
  Top Layer w19.5: J2.1@250,2950 J2.1@259.25,2950 J1.1@2490.75,2950
NetJ3_1: J3.1 J4.1 | length 2237.2
  Top Layer w19.5: J3.1@3003.57,2950 J3.1@3009.25,2950 J4.1@5240.75,2950
NetJ5_1: J5.1 J6.1 | length 2231.5
  Top Layer w19.5: J5.1@259.25,2600 J6.1@2490.75,2600
NetJ7_1: J7.1 J8.1 | length 2239.9
  Top Layer w19.5: J7.1@3009.25,2600 J8.1@5249.18,2600
NetJ9_1: J9.1 J10.1 | length 2231.5
  Top Layer w19.5: J9.1@259.25,2250 J10.1@2490.75,2250
NetJ11_1: J11.1 J12.1 | length 2231.5
  Top Layer w19.5: J11.1@3009.25,2250 J12.1@5240.75,2250
NetJ13_1: J13.1 J14.1 | length 5010
  Top Layer w19.5: 245,1925 5255,1925
NetJ15_1: J15.1 J16.1 | length 5010
  Top Layer w19.5: 245,1575 5255,1575
NetJ17_1: J17.1 J18.1 | length 5010
  Top Layer w19.5: 245,1225 5255,1225
NetJ25_1: J25.1 J26.1 L3.1 | length 2322.7
  Top Layer w16: L3.1@800,720 800,811.22
  Top Layer w19.5: J25.1@259.25,850 J26.1@2490.75,850
NetJ29_1: J29.1 J30.1 L1.1 L1.*@815,400 | length 2240.3
  Top Layer w19.5: J29.1@259.25,400 J30.1@2499.55,400
pads on no net: 0.1 L1.2 L1.*@935,210 L2.2 L2.*@3630,660 L3.2 L3.*
copper on no net: | length 1169.1
  Top Layer w16: 611.21,661 629,661 680,610 680,530 ; 3444,659 3445,660 3510,660
  Top Layer w19.5: 593,210 823.31,210
  Top Layer w50: 354.72,210 593,210 ; 360,661 611.21,661 ; 3231,659 3444,659

## Polygon pours and split planes (outlines as drawn)
GND on Top Layer "GND_L01_P010" (solid, pour order 10): 50,300 2700,300 2700,500 50,500
GND on Top Layer "GND_L01_P004" (solid, pour order 4): 50,2500 2700,2500 2700,2700 50,2700
GND on Top Layer "GND_L01_P009" (solid, pour order 9): 50,750 2700,750 2700,950 50,950
GND on Top Layer "GND_L01_P018" (solid, pour order 18): 2800,300 5450,300 5450,500 2800,500
GND on Top Layer "NONET_L-01_P-001" (solid, pour order 65): 2800,950 5450,950 5450,750 2800,750
GND on Top Layer "GND_L01_P066" (solid, pour order 66): 11.57,1825 5488.43,1825 5488.43,2025 11.57,2025
GND on Top Layer "GND_L01_P068" (solid, pour order 68): 11.57,1125 5490,1125 5490,1325 11.57,1325
GND on Top Layer "GND_L01_P067" (solid, pour order 67): 10,1475 5490,1475 5490,1675 10,1675
GND on Top Layer "GND_L01_P013" (solid, pour order 13): 2800,2150 5450,2150 5450,2350 2800,2350
GND on Top Layer "GND_L01_P012" (solid, pour order 12): 2800,2500 5450,2500 5450,2700 2800,2700
GND on Top Layer "GND_L01_P011" (solid, pour order 11): 2794.32,2850 5450,2850 5450,3050 2794.32,3050
GND on Top Layer "GND_L01_P005" (solid, pour order 5): 50,2150 2700,2150 2700,2350 50,2350
GND on Top Layer "GND_L01_P000" (solid, pour order 0): 50,2850 2700,2850 2700,3050 50,3050
GND on Bottom Layer "GND_L04_P055" (solid, pour order 55): 50,498.99 2700,502.82 2700,300 50,300
GND on Bottom Layer "GND_L04_P049" (solid, pour order 49): 50,2698.99 2700,2702.82 2700,2500 50,2500
GND on Bottom Layer "GND_L04_P054" (solid, pour order 54): 50,948.99 2700,952.82 2700,750 50,750
GND on Bottom Layer "GND_L04_P063" (solid, pour order 63): 2800,498.99 5450,502.82 5450,300 2800,300
GND on Bottom Layer "GND_L04_P062" (solid, pour order 62): 2800,948.99 5450,952.82 5450,750 2800,750
GND on Bottom Layer "NONET_L-01_P-001" (solid, pour order 73): 5490,1825 5490,2025 10,2025 10,1825
GND on Bottom Layer "NONET_L-01_P-001" (solid, pour order 72): 5490,1475 5490,1675 10,1675 10,1475
GND on Bottom Layer "NONET_L-01_P-001" (solid, pour order 69): 5490,1125 5490,1325 10,1325 10,1125
GND on Bottom Layer "GND_L04_P058" (solid, pour order 58): 2800,2348.99 5450,2352.82 5450,2150 2800,2150
GND on Bottom Layer "GND_L04_P057" (solid, pour order 57): 2800,2698.99 5450,2702.82 5450,2500 2800,2500
GND on Bottom Layer "GND_L04_P056" (solid, pour order 56): 2794.32,3048.99 5450,3052.83 5450,2850 2794.32,2850
GND on Bottom Layer "GND_L04_P050" (solid, pour order 50): 50,2348.99 2700,2352.82 2700,2150 50,2150
GND on Bottom Layer "GND_L04_P003" (solid, pour order 3): 50,3047.18 2700,3051.01 2700,2850 50,2850
GND on Mid-Layer 2 "GND_L03_P040" (solid, pour order 40): 50,500 2700,500 2700,300 50,300
GND on Mid-Layer 2 "GND_L03_P034" (solid, pour order 34): 50,2700 2700,2700 2700,2500 50,2500
GND on Mid-Layer 2 "GND_L03_P039" (solid, pour order 39): 50,950 2700,950 2700,750 50,750
GND on Mid-Layer 2 "GND_L03_P042" (solid, pour order 42): 2800,950 5450,950 5450,750 2800,750
GND on Mid-Layer 2 "GND_L03_P041" (solid, pour order 41): 2800,500 5450,500 5450,300 2800,300
GND on Mid-Layer 2 "NONET_L-01_P-001" (solid, pour order 75): 5490,1825 5490,2025 10,2025 10,1825
GND on Mid-Layer 2 "NONET_L-01_P-001" (solid, pour order 74): 5490,1475 5490,1675 10,1675 10,1475
GND on Mid-Layer 2 "NONET_L-01_P-001" (solid, pour order 71): 5490,1125 5490,1325 10,1325 10,1125
GND on Mid-Layer 2 "GND_L03_P048" (solid, pour order 48): 2794.32,3050 5450,3050 5450,2850 2794.32,2850
GND on Mid-Layer 2 "GND_L03_P047" (solid, pour order 47): 2800,2700 5450,2700 5450,2500 2800,2500
GND on Mid-Layer 2 "GND_L03_P046" (solid, pour order 46): 2800,2350 5450,2350 5450,2150 2800,2150
GND on Mid-Layer 2 "GND_L03_P035" (solid, pour order 35): 50,2350 2700,2350 2700,2150 50,2150
GND on Mid-Layer 2 "GND_L03_P002" (solid, pour order 2): 50,3050 2700,3050 2700,2850 50,2850
no net on Bottom Solder "NONET_L02_P-001" (solid): 5490,2025 10,2025 10,1825 5490,1825
no net on Bottom Solder "NONET_L02_P-001" (solid): 5490,1675 10,1675 10,1475 5490,1475
no net on Bottom Solder "NONET_L02_P-001" (solid): 5490,1325 10,1325 10,1125 5490,1125
no net on Bottom Solder "NONET_L02_P-001" (solid): 5450,500 2800,500 2800,300 5450,300
no net on Bottom Solder "NONET_L02_P-001" (solid): 5450,950 2800,950 2800,750 5450,750
no net on Bottom Solder "NONET_L02_P-001" (solid): 5450,2350 2800,2350 2800,2150 5450,2150
no net on Bottom Solder "NONET_L02_P-001" (solid): 5450,2700 2800,2700 2800,2500 5450,2500
no net on Bottom Solder "NONET_L02_P-001" (solid): 5450,3050 2800,3050 2800,2850 5450,2850
no net on Bottom Solder "NONET_L02_P-001" (solid): 2700,500 50,500 50,300 2700,300
no net on Bottom Solder "NONET_L02_P-001" (solid): 2700,950 50,950 50,750 2700,750
no net on Bottom Solder "NONET_L02_P-001" (solid): 2700,2350 50,2350 50,2150 2700,2150
no net on Bottom Solder "NONET_L02_P-001" (solid): 2700,2700 50,2700 50,2500 2700,2500
no net on Bottom Solder "NONET_L02_P-001" (solid): 2700,3050 50,3050 50,2850 2700,2850
GND on Mid-Layer 1 "GND_L02_P025" (solid, pour order 25): 50,500 2700,500 2700,300 50,300
GND on Mid-Layer 1 "GND_L02_P019" (solid, pour order 19): 50,2700 2700,2700 2700,2500 50,2500
GND on Mid-Layer 1 "GND_L02_P024" (solid, pour order 24): 50,950 2700,950 2700,750 50,750
GND on Mid-Layer 1 "GND_L02_P033" (solid, pour order 33): 2800,500 5450,500 5450,300 2800,300
GND on Mid-Layer 1 "GND_L02_P032" (solid, pour order 32): 2800,950 5450,950 5450,750 2800,750
GND on Mid-Layer 1 "NONET_L-01_P-001" (solid, pour order 77): 5490,1825 5490,2025 10,2025 10,1825
GND on Mid-Layer 1 "NONET_L-01_P-001" (solid, pour order 76): 5490,1475 5490,1675 10,1675 10,1475
GND on Mid-Layer 1 "NONET_L-01_P-001" (solid, pour order 70): 5490,1125 5490,1325 10,1325 10,1125
GND on Mid-Layer 1 "GND_L02_P028" (solid, pour order 28): 2800,2350 5450,2350 5450,2150 2800,2150
GND on Mid-Layer 1 "GND_L02_P027" (solid, pour order 27): 2800,2700 5450,2700 5450,2500 2800,2500
GND on Mid-Layer 1 "GND_L02_P026" (solid, pour order 26): 2794.32,3050 5450,3050 5450,2850 2794.32,2850
GND on Mid-Layer 1 "GND_L02_P020" (solid, pour order 20): 50,2350 2700,2350 2700,2150 50,2150
GND on Mid-Layer 1 "GND_L02_P001" (solid, pour order 1): 50,3050 2700,3050 2700,2850 50,2850
no net on Top Solder "NONET_L02_P-001" (solid): 3785,500 3055,500 3055,300 3785,300
no net on Top Solder "NONET_L02_P-001" (solid): 1025,500 305,500 305,300 1025,300
no net on Top Solder "NONET_L02_P-001" (solid): 3075,750 3075,950 4140,950 4140,750

## Keep-outs
Keep-Out Layer:
  lines w10: 0,629.92 0,0 ; 0,0 5500,0 5500,3250 1428.4,3250 0,3250 0,0

## Other copper
Top Layer:
  pour cut-out: 5415.5,400 ccw(c5350,400) 5350,465.5 ccw(c5350,400) 5284.5,400 ccw(c5350,400) 5350,334.5 ccw(c5350,400)
  pour cut-out: 5415.5,400 ccw(c5350,400) 5350,465.5 ccw(c5350,400) 5284.5,400 ccw(c5350,400) 5350,334.5 ccw(c5350,400)
  pour cut-out: 5415.5,850 ccw(c5350,850) 5350,915.5 ccw(c5350,850) 5284.5,850 ccw(c5350,850) 5350,784.5 ccw(c5350,850)
  pour cut-out: 5415.5,850 ccw(c5350,850) 5350,915.5 ccw(c5350,850) 5284.5,850 ccw(c5350,850) 5350,784.5 ccw(c5350,850)
  pour cut-out: 2665.5,400 ccw(c2600,400) 2600,465.5 ccw(c2600,400) 2534.5,400 ccw(c2600,400) 2600,334.5 ccw(c2600,400)
  pour cut-out: 2665.5,400 ccw(c2600,400) 2600,465.5 ccw(c2600,400) 2534.5,400 ccw(c2600,400) 2600,334.5 ccw(c2600,400)
  pour cut-out: 2665.5,850 ccw(c2600,850) 2600,915.5 ccw(c2600,850) 2534.5,850 ccw(c2600,850) 2600,784.5 ccw(c2600,850)
  pour cut-out: 2665.5,850 ccw(c2600,850) 2600,915.5 ccw(c2600,850) 2534.5,850 ccw(c2600,850) 2600,784.5 ccw(c2600,850)
  pour cut-out: 2834.5,400 ccw(c2900,400) 2900,334.5 ccw(c2900,400) 2965.5,400 ccw(c2900,400) 2900,465.5 ccw(c2900,400)
  pour cut-out: 2834.5,400 ccw(c2900,400) 2900,334.5 ccw(c2900,400) 2965.5,400 ccw(c2900,400) 2900,465.5 ccw(c2900,400)
  pour cut-out: 2834.5,850 ccw(c2900,850) 2900,784.5 ccw(c2900,850) 2965.5,850 ccw(c2900,850) 2900,915.5 ccw(c2900,850)
  pour cut-out: 2834.5,850 ccw(c2900,850) 2900,784.5 ccw(c2900,850) 2965.5,850 ccw(c2900,850) 2900,915.5 ccw(c2900,850)
  pour cut-out: 84.5,400 ccw(c150,400) 150,334.5 ccw(c150,400) 215.5,400 ccw(c150,400) 150,465.5 ccw(c150,400)
  pour cut-out: 84.5,400 ccw(c150,400) 150,334.5 ccw(c150,400) 215.5,400 ccw(c150,400) 150,465.5 ccw(c150,400)
  pour cut-out: 84.5,850 ccw(c150,850) 150,784.5 ccw(c150,850) 215.5,850 ccw(c150,850) 150,915.5 ccw(c150,850)
  pour cut-out: 84.5,850 ccw(c150,850) 150,784.5 ccw(c150,850) 215.5,850 ccw(c150,850) 150,915.5 ccw(c150,850)
  pour cut-out: 5415.5,2250 ccw(c5350,2250) 5350,2315.5 ccw(c5350,2250) 5284.5,2250 ccw(c5350,2250) 5350,2184.5 ccw(c5350,2250)
  pour cut-out: 5415.5,2250 ccw(c5350,2250) 5350,2315.5 ccw(c5350,2250) 5284.5,2250 ccw(c5350,2250) 5350,2184.5 ccw(c5350,2250)
  pour cut-out: 2834.5,2250 ccw(c2900,2250) 2900,2184.5 ccw(c2900,2250) 2965.5,2250 ccw(c2900,2250) 2900,2315.5 ccw(c2900,2250)
  pour cut-out: 2834.5,2250 ccw(c2900,2250) 2900,2184.5 ccw(c2900,2250) 2965.5,2250 ccw(c2900,2250) 2900,2315.5 ccw(c2900,2250)
  pour cut-out: 2665.5,2250 ccw(c2600,2250) 2600,2315.5 ccw(c2600,2250) 2534.5,2250 ccw(c2600,2250) 2600,2184.5 ccw(c2600,2250)
  pour cut-out: 2665.5,2250 ccw(c2600,2250) 2600,2315.5 ccw(c2600,2250) 2534.5,2250 ccw(c2600,2250) 2600,2184.5 ccw(c2600,2250)
  pour cut-out: 84.5,2250 ccw(c150,2250) 150,2184.5 ccw(c150,2250) 215.5,2250 ccw(c150,2250) 150,2315.5 ccw(c150,2250)
  pour cut-out: 84.5,2250 ccw(c150,2250) 150,2184.5 ccw(c150,2250) 215.5,2250 ccw(c150,2250) 150,2315.5 ccw(c150,2250)
  pour cut-out: 5415.5,2600 ccw(c5350,2600) 5350,2665.5 ccw(c5350,2600) 5284.5,2600 ccw(c5350,2600) 5350,2534.5 ccw(c5350,2600)
  pour cut-out: 5415.5,2600 ccw(c5350,2600) 5350,2665.5 ccw(c5350,2600) 5284.5,2600 ccw(c5350,2600) 5350,2534.5 ccw(c5350,2600)
  pour cut-out: 2834.5,2600 ccw(c2900,2600) 2900,2534.5 ccw(c2900,2600) 2965.5,2600 ccw(c2900,2600) 2900,2665.5 ccw(c2900,2600)
  pour cut-out: 2834.5,2600 ccw(c2900,2600) 2900,2534.5 ccw(c2900,2600) 2965.5,2600 ccw(c2900,2600) 2900,2665.5 ccw(c2900,2600)
  pour cut-out: 2665.5,2600 ccw(c2600,2600) 2600,2665.5 ccw(c2600,2600) 2534.5,2600 ccw(c2600,2600) 2600,2534.5 ccw(c2600,2600)
  pour cut-out: 2665.5,2600 ccw(c2600,2600) 2600,2665.5 ccw(c2600,2600) 2534.5,2600 ccw(c2600,2600) 2600,2534.5 ccw(c2600,2600)
  pour cut-out: 84.5,2600 ccw(c150,2600) 150,2534.5 ccw(c150,2600) 215.5,2600 ccw(c150,2600) 150,2665.5 ccw(c150,2600)
  pour cut-out: 84.5,2600 ccw(c150,2600) 150,2534.5 ccw(c150,2600) 215.5,2600 ccw(c150,2600) 150,2665.5 ccw(c150,2600)
  pour cut-out: 5415.5,2950 ccw(c5350,2950) 5350,3015.5 ccw(c5350,2950) 5284.5,2950 ccw(c5350,2950) 5350,2884.5 ccw(c5350,2950)
  pour cut-out: 5415.5,2950 ccw(c5350,2950) 5350,3015.5 ccw(c5350,2950) 5284.5,2950 ccw(c5350,2950) 5350,2884.5 ccw(c5350,2950)
  pour cut-out: 2834.5,2950 ccw(c2900,2950) 2900,2884.5 ccw(c2900,2950) 2965.5,2950 ccw(c2900,2950) 2900,3015.5 ccw(c2900,2950)
  pour cut-out: 2834.5,2950 ccw(c2900,2950) 2900,2884.5 ccw(c2900,2950) 2965.5,2950 ccw(c2900,2950) 2900,3015.5 ccw(c2900,2950)
  pour cut-out: 2665.5,2950 ccw(c2600,2950) 2600,3015.5 ccw(c2600,2950) 2534.5,2950 ccw(c2600,2950) 2600,2884.5 ccw(c2600,2950)
  pour cut-out: 2665.5,2950 ccw(c2600,2950) 2600,3015.5 ccw(c2600,2950) 2534.5,2950 ccw(c2600,2950) 2600,2884.5 ccw(c2600,2950)
  pour cut-out: 84.5,2950 ccw(c150,2950) 150,2884.5 ccw(c150,2950) 215.5,2950 ccw(c150,2950) 150,3015.5 ccw(c150,2950)
  pour cut-out: 84.5,2950 ccw(c150,2950) 150,2884.5 ccw(c150,2950) 215.5,2950 ccw(c150,2950) 150,3015.5 ccw(c150,2950)
  pour cut-out: 5200,428 5180,408 5180,392 5200,372
  pour cut-out: 5200,428 5350,428 5350,372 5200,372
  pour cut-out: 5200,878 5180,858 5180,842 5200,822
  pour cut-out: 5200,878 5350,878 5350,822 5200,822
  pour cut-out: 2450,428 2430,408 2430,392 2450,372
  pour cut-out: 2450,428 2600,428 2600,372 2450,372
  pour cut-out: 2450,878 2430,858 2430,842 2450,822
  pour cut-out: 2450,878 2600,878 2600,822 2450,822
  pour cut-out: 3050,372 3070,392 3070,408 3050,428
  pour cut-out: 3050,372 2900,372 2900,428 3050,428
  pour cut-out: 3050,822 3070,842 3070,858 3050,878
  pour cut-out: 3050,822 2900,822 2900,878 3050,878
  pour cut-out: 300,372 320,392 320,408 300,428
  pour cut-out: 300,372 150,372 150,428 300,428
  pour cut-out: 300,822 320,842 320,858 300,878
  pour cut-out: 300,822 150,822 150,878 300,878
  pour cut-out: 5261,1211 5261,1239 5312,1239 5312,1211
  pour cut-out: 239,1245 239,1205 182,1205 182,1245
  pour cut-out: 5261,1550 5261,1600 5323,1600 5323,1550
  pour cut-out: 239,1605 239,1545 172,1545 172,1605
  pour cut-out: 5261,1891 5261,1959 5333,1959 5333,1891
  pour cut-out: 239,1965 239,1885 162,1885 162,1965
  pour cut-out: 5200,2978 5350,2978 5350,2922 5200,2922
  pour cut-out: 5200,2978 5180,2958 5180,2942 5200,2922
  pour cut-out: 3050,2922 2900,2922 2900,2978 3050,2978
  pour cut-out: 3050,2922 3070,2942 3070,2958 3050,2978
  pour cut-out: 2450,2978 2600,2978 2600,2922 2450,2922
  pour cut-out: 2450,2978 2430,2958 2430,2942 2450,2922
  pour cut-out: 5200,2634 5350,2634 5350,2566 5200,2566
  pour cut-out: 5200,2634 5180,2614 5180,2586 5200,2566
  pour cut-out: 3050,2566 2900,2566 2900,2634 3050,2634
  pour cut-out: 3050,2566 3070,2586 3070,2614 3050,2634
  pour cut-out: 2450,2634 2600,2634 2600,2566 2450,2566
  pour cut-out: 2450,2634 2430,2614 2430,2586 2450,2566
  pour cut-out: 5200,2290 5350,2290 5350,2210 5200,2210
  pour cut-out: 5200,2290 5173,2263 5173,2237 5200,2210
  pour cut-out: 3050,2210 2900,2210 2900,2290 3050,2290
  pour cut-out: 3050,2210 3077,2237 3077,2263 3050,2290
  pour cut-out: 2450,2290 2600,2290 2600,2210 2450,2210
  pour cut-out: 2450,2290 2423,2263 2423,2237 2450,2210
  pour cut-out: 300,2210 327,2237 327,2263 300,2290
  pour cut-out: 300,2566 320,2586 320,2614 300,2634
  pour cut-out: 300,2922 320,2942 320,2958 300,2978
  pour cut-out: 300,2210 150,2210 150,2290 300,2290
  pour cut-out: 300,2566 150,2566 150,2634 300,2634
  pour cut-out: 300,2922 150,2922 150,2978 300,2978
Mid-Layer 1:
  pour cut-out: 5415.5,400.5 ccw(c5350,400.5) 5350,466 ccw(c5350,400.5) 5284.5,400.5 ccw(c5350,400.5) 5350,335 ccw(c5350,400.5)
  pour cut-out: 5415.5,850.5 ccw(c5350,850.5) 5350,916 ccw(c5350,850.5) 5284.5,850.5 ccw(c5350,850.5) 5350,785 ccw(c5350,850.5)
  pour cut-out: 2834.5,399.5 ccw(c2900,399.5) 2900,334 ccw(c2900,399.5) 2965.5,399.5 ccw(c2900,399.5) 2900,465 ccw(c2900,399.5)
  pour cut-out: 2834.5,849.5 ccw(c2900,849.5) 2900,784 ccw(c2900,849.5) 2965.5,849.5 ccw(c2900,849.5) 2900,915 ccw(c2900,849.5)
  pour cut-out: 2665.5,850.5 ccw(c2600,850.5) 2600,916 ccw(c2600,850.5) 2534.5,850.5 ccw(c2600,850.5) 2600,785 ccw(c2600,850.5)
  pour cut-out: 2665.5,400.5 ccw(c2600,400.5) 2600,466 ccw(c2600,400.5) 2534.5,400.5 ccw(c2600,400.5) 2600,335 ccw(c2600,400.5)
  pour cut-out: 84.5,399.5 ccw(c150,399.5) 150,334 ccw(c150,399.5) 215.5,399.5 ccw(c150,399.5) 150,465 ccw(c150,399.5)
  pour cut-out: 84.5,849.5 ccw(c150,849.5) 150,784 ccw(c150,849.5) 215.5,849.5 ccw(c150,849.5) 150,915 ccw(c150,849.5)
  pour cut-out: 5415.5,2250.5 ccw(c5350,2250.5) 5350,2316 ccw(c5350,2250.5) 5284.5,2250.5 ccw(c5350,2250.5) 5350,2185 ccw(c5350,2250.5)
  pour cut-out: 5415.5,2600.5 ccw(c5350,2600.5) 5350,2666 ccw(c5350,2600.5) 5284.5,2600.5 ccw(c5350,2600.5) 5350,2535 ccw(c5350,2600.5)
  pour cut-out: 2834.5,2249.5 ccw(c2900,2249.5) 2900,2184 ccw(c2900,2249.5) 2965.5,2249.5 ccw(c2900,2249.5) 2900,2315 ccw(c2900,2249.5)
  pour cut-out: 2834.5,2599.5 ccw(c2900,2599.5) 2900,2534 ccw(c2900,2599.5) 2965.5,2599.5 ccw(c2900,2599.5) 2900,2665 ccw(c2900,2599.5)
  pour cut-out: 2665.5,2250.5 ccw(c2600,2250.5) 2600,2316 ccw(c2600,2250.5) 2534.5,2250.5 ccw(c2600,2250.5) 2600,2185 ccw(c2600,2250.5)
  pour cut-out: 2665.5,2600.5 ccw(c2600,2600.5) 2600,2666 ccw(c2600,2600.5) 2534.5,2600.5 ccw(c2600,2600.5) 2600,2535 ccw(c2600,2600.5)
  pour cut-out: 84.5,2249.5 ccw(c150,2249.5) 150,2184 ccw(c150,2249.5) 215.5,2249.5 ccw(c150,2249.5) 150,2315 ccw(c150,2249.5)
  pour cut-out: 84.5,2599.5 ccw(c150,2599.5) 150,2534 ccw(c150,2599.5) 215.5,2599.5 ccw(c150,2599.5) 150,2665 ccw(c150,2599.5)
  pour cut-out: 5415.5,2950.5 ccw(c5350,2950.5) 5350,3016 ccw(c5350,2950.5) 5284.5,2950.5 ccw(c5350,2950.5) 5350,2885 ccw(c5350,2950.5)
  pour cut-out: 2834.5,2949.5 ccw(c2900,2949.5) 2900,2884 ccw(c2900,2949.5) 2965.5,2949.5 ccw(c2900,2949.5) 2900,3015 ccw(c2900,2949.5)
  pour cut-out: 2665.5,2950.5 ccw(c2600,2950.5) 2600,3016 ccw(c2600,2950.5) 2534.5,2950.5 ccw(c2600,2950.5) 2600,2885 ccw(c2600,2950.5)
  pour cut-out: 84.5,2949.5 ccw(c150,2949.5) 150,2884 ccw(c150,2949.5) 215.5,2949.5 ccw(c150,2949.5) 150,3015 ccw(c150,2949.5)
  pour cut-out: 5204,422 5204,378 5182,400
  pour cut-out: 5204,422 5350,422 5350,378 5204,378
  pour cut-out: 5204,872 5204,828 5182,850
  pour cut-out: 5204,872 5350,872 5350,828 5204,828
  pour cut-out: 3046,378 3046,422 3068,400
  pour cut-out: 3046,378 2900,378 2900,422 3046,422
  pour cut-out: 3046,828 3046,872 3068,850
  pour cut-out: 3046,828 2900,828 2900,872 3046,872
  pour cut-out: 2454,872 2454,828 2432,850
  pour cut-out: 2454,872 2600,872 2600,828 2454,828
  pour cut-out: 2454,422 2454,378 2432,400
  pour cut-out: 2454,422 2600,422 2600,378 2454,378
  pour cut-out: 296,378 296,422 318,400
  pour cut-out: 296,378 150,378 150,422 296,422
  pour cut-out: 296,828 150,828 150,872 296,872
  pour cut-out: 296,828 296,872 318,850
  pour cut-out: 5204,2272 5350,2272 5350,2228 5204,2228
  pour cut-out: 5204,2272 5204,2228 5182,2250
  pour cut-out: 5204,2622 5350,2622 5350,2578 5204,2578
  pour cut-out: 5204,2622 5204,2578 5182,2600
  pour cut-out: 3046,2228 2900,2228 2900,2272 3046,2272
  pour cut-out: 3046,2228 3046,2272 3068,2250
  pour cut-out: 3046,2578 2900,2578 2900,2622 3046,2622
  pour cut-out: 3046,2578 3046,2622 3068,2600
  pour cut-out: 2454,2272 2600,2272 2600,2228 2454,2228
  pour cut-out: 2454,2272 2454,2228 2432,2250
  pour cut-out: 2454,2622 2600,2622 2600,2578 2454,2578
  pour cut-out: 2454,2622 2454,2578 2432,2600
  pour cut-out: 296,2228 150,2228 150,2272 296,2272
  pour cut-out: 296,2228 296,2272 318,2250
  pour cut-out: 296,2578 150,2578 150,2622 296,2622
  pour cut-out: 296,2578 296,2622 318,2600
  pour cut-out: 5204,2972 5204,2928 5182,2950
  pour cut-out: 5204,2972 5350,2972 5350,2928 5204,2928
  pour cut-out: 3046,2928 3046,2972 3068,2950
  pour cut-out: 3046,2928 2900,2928 2900,2972 3046,2972
  pour cut-out: 2454,2972 2600,2972 2600,2928 2454,2928
  pour cut-out: 2454,2972 2454,2928 2432,2950
  pour cut-out: 296,2928 296,2972 318,2950
  pour cut-out: 296,2928 150,2928 150,2972 296,2972
Mid-Layer 2:
  pour cut-out: 5416,400 ccw(c5350.5,400) 5350.5,465.5 ccw(c5350.5,400) 5285,400 ccw(c5350.5,400) 5350.5,334.5 ccw(c5350.5,400)
  pour cut-out: 5416,850 ccw(c5350.5,850) 5350.5,915.5 ccw(c5350.5,850) 5285,850 ccw(c5350.5,850) 5350.5,784.5 ccw(c5350.5,850)
  pour cut-out: 2834,400 ccw(c2899.5,400) 2899.5,334.5 ccw(c2899.5,400) 2965,400 ccw(c2899.5,400) 2899.5,465.5 ccw(c2899.5,400)
  pour cut-out: 2834,850 ccw(c2899.5,850) 2899.5,784.5 ccw(c2899.5,850) 2965,850 ccw(c2899.5,850) 2899.5,915.5 ccw(c2899.5,850)
  pour cut-out: 2666,850 ccw(c2600.5,850) 2600.5,915.5 ccw(c2600.5,850) 2535,850 ccw(c2600.5,850) 2600.5,784.5 ccw(c2600.5,850)
  pour cut-out: 2666,400 ccw(c2600.5,400) 2600.5,465.5 ccw(c2600.5,400) 2535,400 ccw(c2600.5,400) 2600.5,334.5 ccw(c2600.5,400)
  pour cut-out: 84,400 ccw(c149.5,400) 149.5,334.5 ccw(c149.5,400) 215,400 ccw(c149.5,400) 149.5,465.5 ccw(c149.5,400)
  pour cut-out: 84,850 ccw(c149.5,850) 149.5,784.5 ccw(c149.5,850) 215,850 ccw(c149.5,850) 149.5,915.5 ccw(c149.5,850)
  pour cut-out: 5416,2250 ccw(c5350.5,2250) 5350.5,2315.5 ccw(c5350.5,2250) 5285,2250 ccw(c5350.5,2250) 5350.5,2184.5 ccw(c5350.5,2250)
  pour cut-out: 5416,2600 ccw(c5350.5,2600) 5350.5,2665.5 ccw(c5350.5,2600) 5285,2600 ccw(c5350.5,2600) 5350.5,2534.5 ccw(c5350.5,2600)
  pour cut-out: 2834,2250 ccw(c2899.5,2250) 2899.5,2184.5 ccw(c2899.5,2250) 2965,2250 ccw(c2899.5,2250) 2899.5,2315.5 ccw(c2899.5,2250)
  pour cut-out: 2834,2600 ccw(c2899.5,2600) 2899.5,2534.5 ccw(c2899.5,2600) 2965,2600 ccw(c2899.5,2600) 2899.5,2665.5 ccw(c2899.5,2600)
  pour cut-out: 2666,2250 ccw(c2600.5,2250) 2600.5,2315.5 ccw(c2600.5,2250) 2535,2250 ccw(c2600.5,2250) 2600.5,2184.5 ccw(c2600.5,2250)
  pour cut-out: 2666,2600 ccw(c2600.5,2600) 2600.5,2665.5 ccw(c2600.5,2600) 2535,2600 ccw(c2600.5,2600) 2600.5,2534.5 ccw(c2600.5,2600)
  pour cut-out: 84,2250 ccw(c149.5,2250) 149.5,2184.5 ccw(c149.5,2250) 215,2250 ccw(c149.5,2250) 149.5,2315.5 ccw(c149.5,2250)
  pour cut-out: 84,2600 ccw(c149.5,2600) 149.5,2534.5 ccw(c149.5,2600) 215,2600 ccw(c149.5,2600) 149.5,2665.5 ccw(c149.5,2600)
  pour cut-out: 5416,2950 ccw(c5350.5,2950) 5350.5,3015.5 ccw(c5350.5,2950) 5285,2950 ccw(c5350.5,2950) 5350.5,2884.5 ccw(c5350.5,2950)
  pour cut-out: 2834,2950 ccw(c2899.5,2950) 2899.5,2884.5 ccw(c2899.5,2950) 2965,2950 ccw(c2899.5,2950) 2899.5,3015.5 ccw(c2899.5,2950)
  pour cut-out: 2666,2950 ccw(c2600.5,2950) 2600.5,3015.5 ccw(c2600.5,2950) 2535,2950 ccw(c2600.5,2950) 2600.5,2884.5 ccw(c2600.5,2950)
  pour cut-out: 84,2950 ccw(c149.5,2950) 149.5,2884.5 ccw(c149.5,2950) 215,2950 ccw(c149.5,2950) 149.5,3015.5 ccw(c149.5,2950)
  pour cut-out: 5204,422 5204,378 5182,400
  pour cut-out: 5204,422 5350,422 5350,378 5204,378
  pour cut-out: 5204,872 5204,828 5182,850
  pour cut-out: 5204,872 5350,872 5350,828 5204,828
  pour cut-out: 3046,378 3046,422 3068,400
  pour cut-out: 3046,378 2900,378 2900,422 3046,422
  pour cut-out: 3046,828 3046,872 3068,850
  pour cut-out: 3046,828 2900,828 2900,872 3046,872
  pour cut-out: 2454,872 2454,828 2432,850
  pour cut-out: 2454,872 2600,872 2600,828 2454,828
  pour cut-out: 2454,422 2454,378 2432,400
  pour cut-out: 2454,422 2600,422 2600,378 2454,378
  pour cut-out: 296,378 150,378 150,422 296,422
  pour cut-out: 296,378 296,422 318,400
  pour cut-out: 296,828 296,872 318,850
  pour cut-out: 296,828 150,828 150,872 296,872
  pour cut-out: 5204,2272 5204,2228 5182,2250
  pour cut-out: 5204,2272 5350,2272 5350,2228 5204,2228
  pour cut-out: 5204,2622 5204,2578 5182,2600
  pour cut-out: 5204,2622 5350,2622 5350,2578 5204,2578
  pour cut-out: 3046,2228 3046,2272 3068,2250
  pour cut-out: 3046,2228 2900,2228 2900,2272 3046,2272
  pour cut-out: 3046,2578 3046,2622 3068,2600
  pour cut-out: 3046,2578 2900,2578 2900,2622 3046,2622
  pour cut-out: 2454,2272 2454,2228 2432,2250
  pour cut-out: 2454,2272 2600,2272 2600,2228 2454,2228
  pour cut-out: 2454,2622 2454,2578 2432,2600
  pour cut-out: 2454,2622 2600,2622 2600,2578 2454,2578
  pour cut-out: 296,2228 296,2272 318,2250
  pour cut-out: 296,2228 150,2228 150,2272 296,2272
  pour cut-out: 296,2578 296,2622 318,2600
  pour cut-out: 296,2578 150,2578 150,2622 296,2622
  pour cut-out: 5204,2972 5350,2972 5350,2928 5204,2928
  pour cut-out: 5204,2972 5204,2928 5182,2950
  pour cut-out: 3046,2928 2900,2928 2900,2972 3046,2972
  pour cut-out: 3046,2928 3046,2972 3068,2950
  pour cut-out: 2454,2972 2454,2928 2432,2950
  pour cut-out: 2454,2972 2600,2972 2600,2928 2454,2928
  pour cut-out: 296,2928 150,2928 150,2972 296,2972
  pour cut-out: 296,2928 296,2972 318,2950